# EAGLE board StackBreakoutConnection_4layers_V1.0_with_connector (EAGLE 9.6.2)
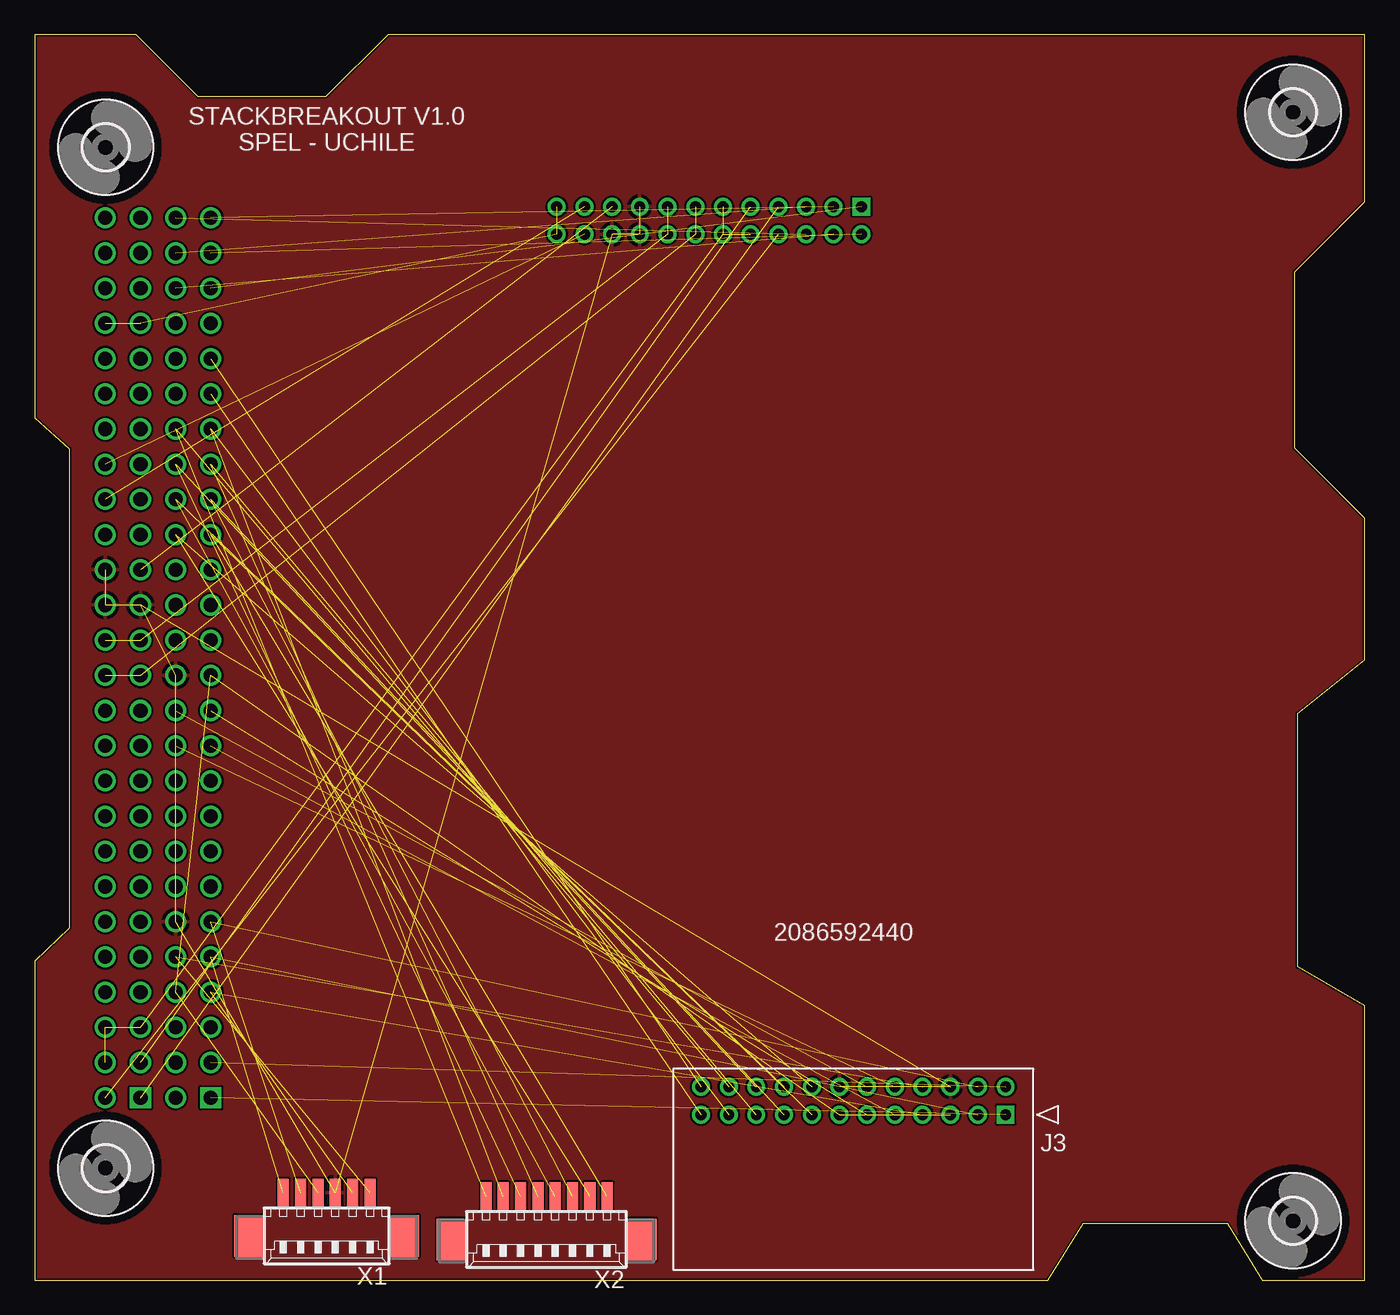
[diagram p0: board, top side]
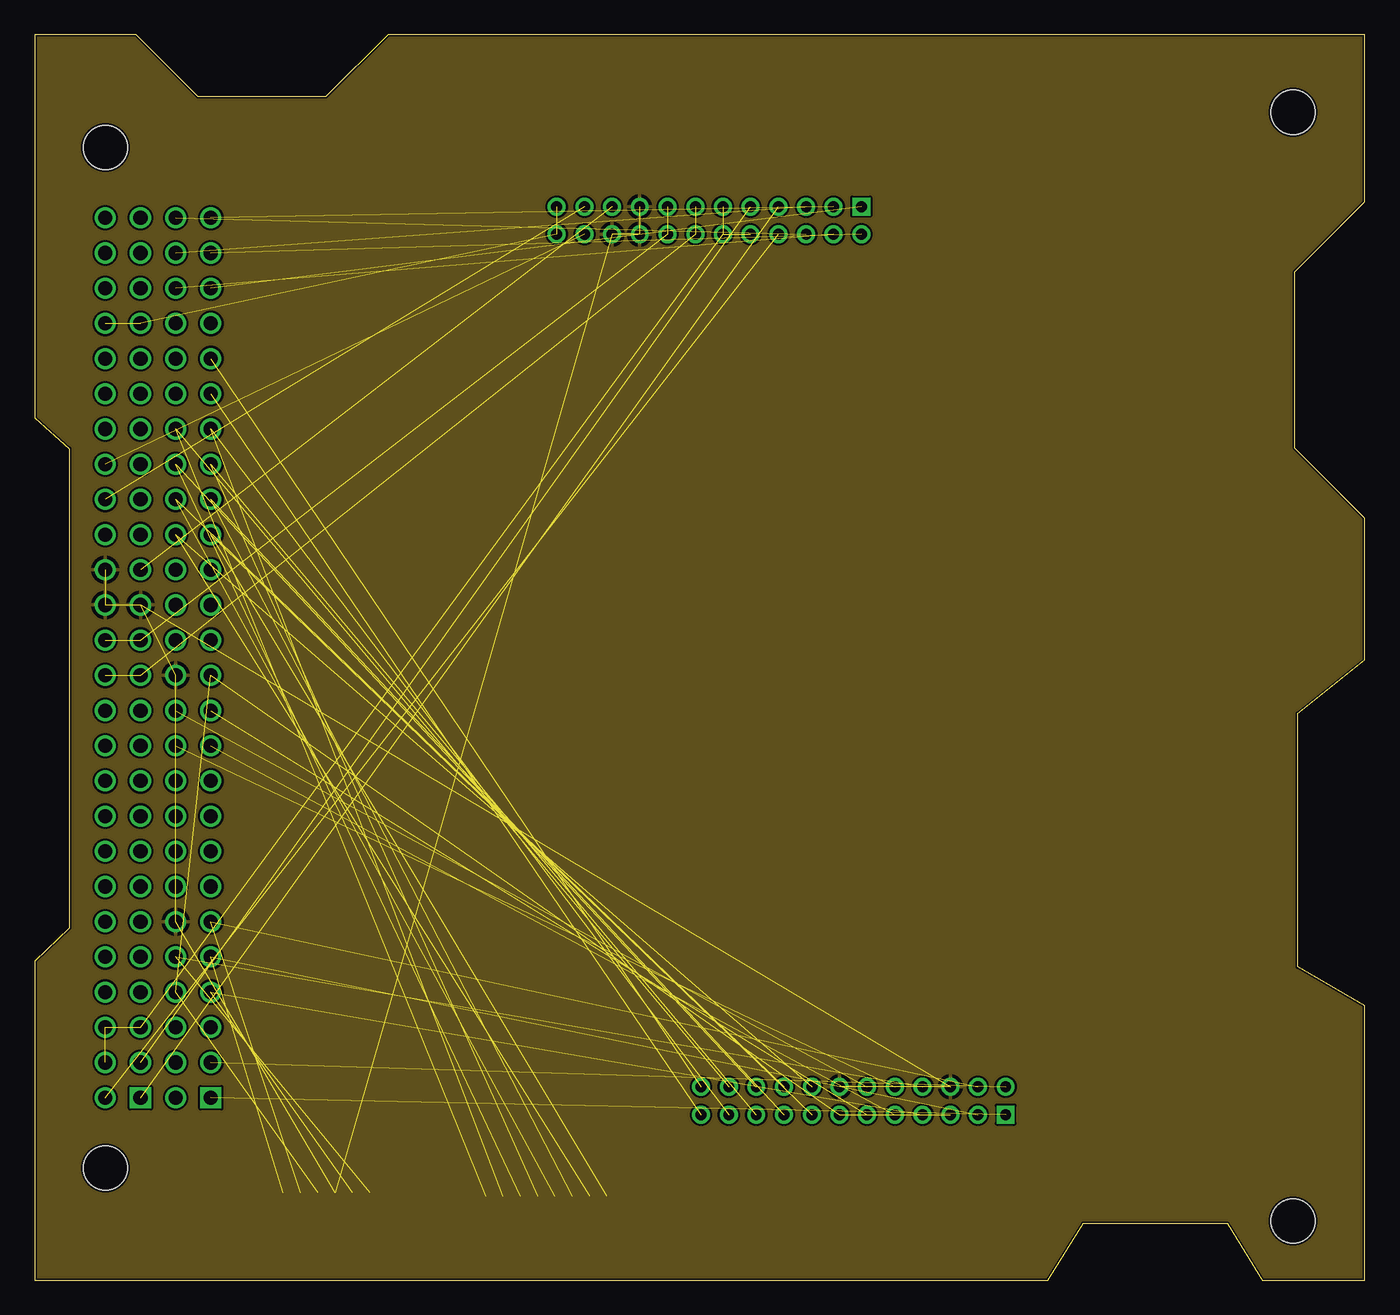
[diagram p1: board, inner layer Route2]
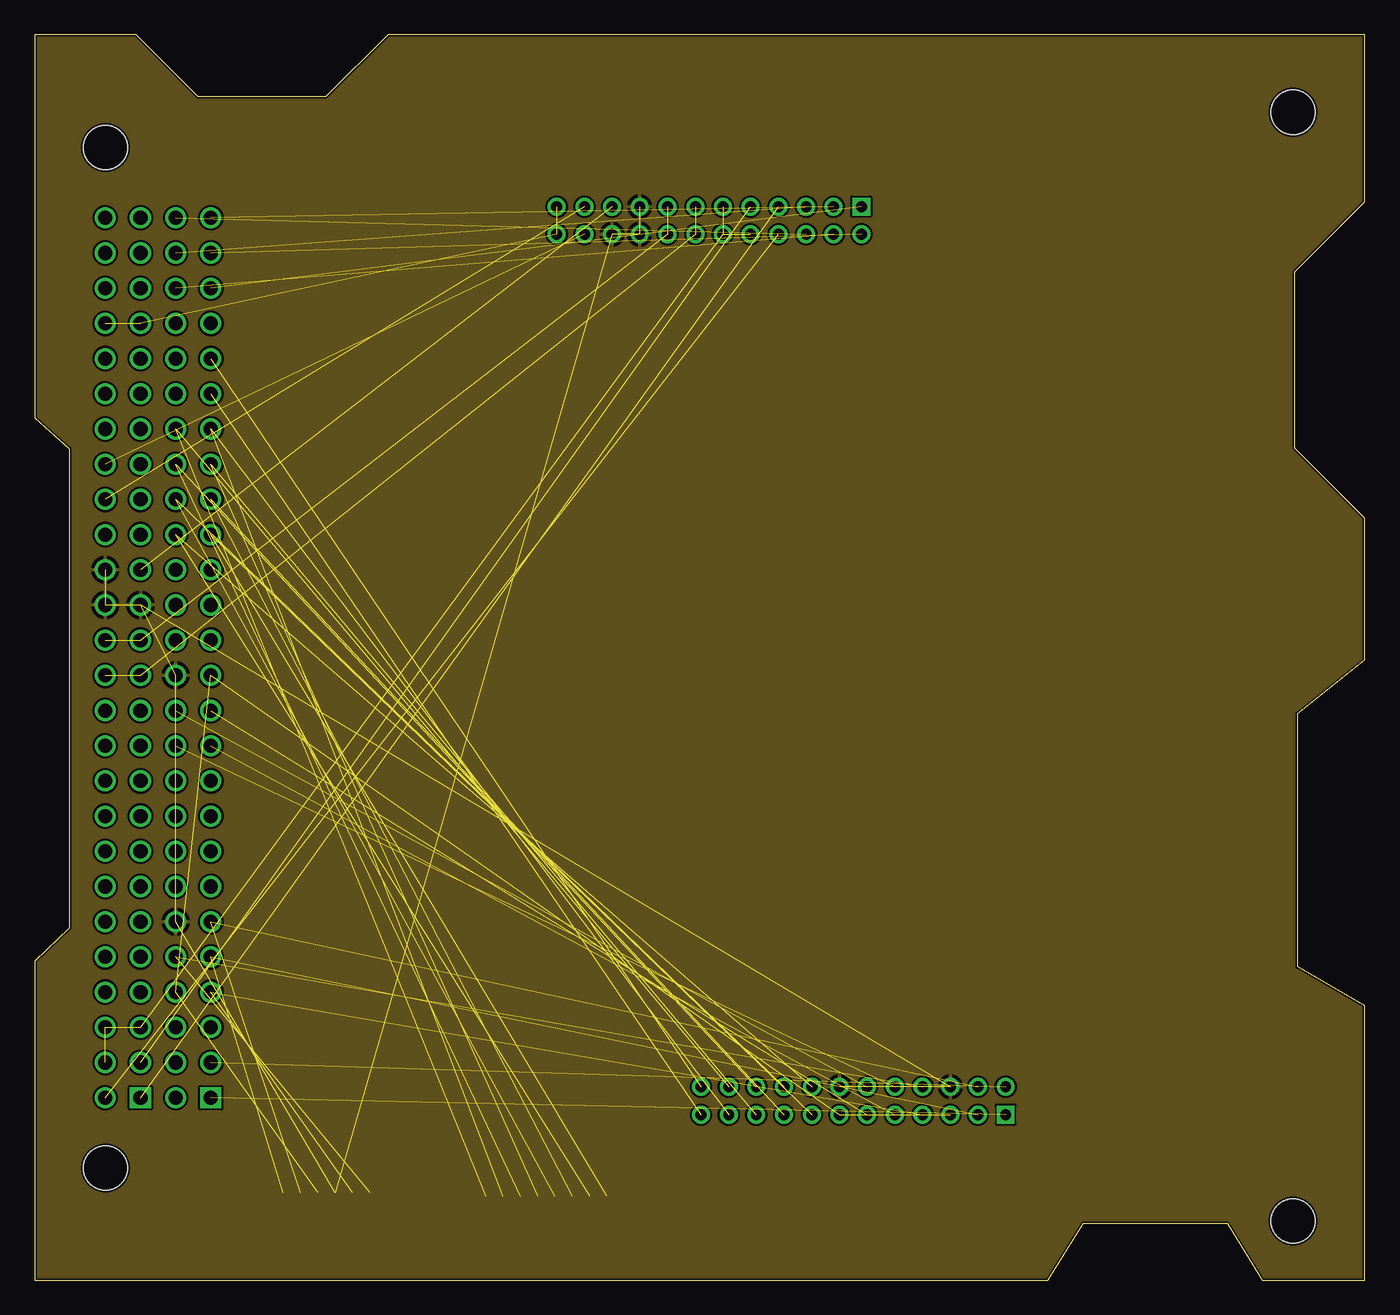
[diagram p2: board, inner layer Route15]
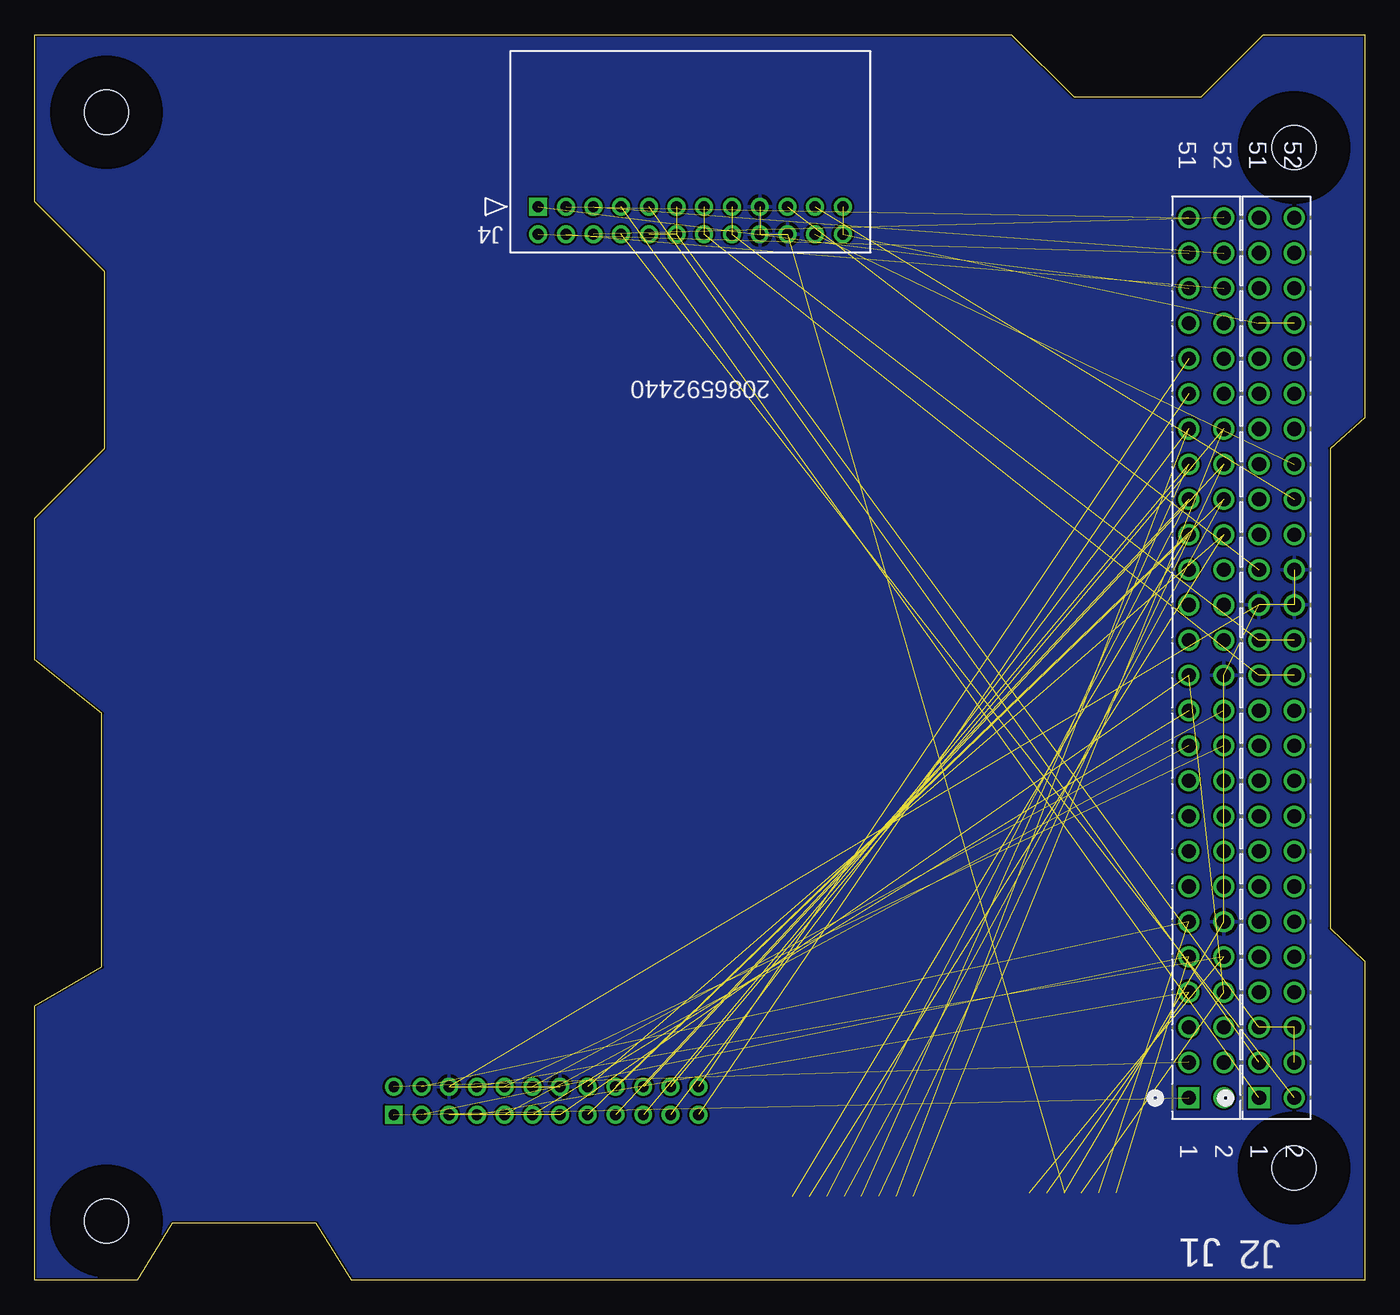
[diagram p3: board, bottom side, seen from below]

Size 96.04 x 89.88 mm. Coordinates in mm from the lower left corner, seen from the top.
Outline: 90.98,72.77 96.04,77.83 96.04,89.88 25.51,89.88 21.02,85.4 11.8,85.4 7.32,89.88 0,89.88 0,62.23 2.5,60 2.5,25.4 0,23 0,0 73.15,0 75.7,4.1 86.09,4.1 88.65,0 96.01,0 96.01,19.81 91.19,22.61 91.19,40.89 96.04,44.76 96.04,54.97 90.98,60.02 90.98,72.77
Copper layers (1+2*15+16): Top 0.035mm / dielectric 1.5mm / Route2 0.035mm / dielectric 0.15mm / Route15 0.035mm / dielectric 0.2mm / Bottom 0.035mm
Design rules "default *": minimum track width 20mil, minimum drill 0.2mm, track to track 6mil, track to pad 6mil, pad to pad 6mil, via to via 6mil, smd to smd 6mil, copper to edge 6mil, drill to drill 6mil, minimum pad ring 10mil, minimum via ring 8mil, stop-mask expansion 4mil, vias tented up to drill 0mil, thermal gap 10mil

## Footprints (pad centres in the part's own frame; a part is rotated, then mirrored left to right if it is on the bottom)
SAMTEC_SSQ-126-23-G-D = drill 1.016 square: 1 63.5,-2.54 | drill 1.016: 2 63.5,0; 3 60.96,-2.54; 4 60.96,0; 5 58.42,-2.54; 6 58.42,0; 7 55.88,-2.54; 8 55.88,0; 9 53.34,-2.54; 10 53.34,0; 11 50.8,-2.54; 12 50.8,0; 13 48.26,-2.54; 14 48.26,0; 15 45.72,-2.54; 16 45.72,0; 17 43.18,-2.54; 18 43.18,0; 19 40.64,-2.54; 20 40.64,0; 21 38.1,-2.54; 22 38.1,0; 23 35.56,-2.54; 24 35.56,0; 25 33.02,-2.54; 26 33.02,0; 27 30.48,-2.54; 28 30.48,0; 29 27.94,-2.54; 30 27.94,0; 31 25.4,-2.54; 32 25.4,0; 33 22.86,-2.54; 34 22.86,0; 35 20.32,-2.54; 36 20.32,0; 37 17.78,-2.54; 38 17.78,0; 39 15.24,-2.54; 40 15.24,0; 41 12.7,-2.54; 42 12.7,0; 43 10.16,-2.54; 44 10.16,0; 45 7.62,-2.54; 46 7.62,0; 47 5.08,-2.54; 48 5.08,0; 49 2.54,-2.54; 50 2.54,0; 51 0,-2.54; 52 0,0
CON_2086592440_MOL = drill 0.787 pad 1.143 square: 1 0,0 | drill 0.787 pad 1.143: 2 0,2.007; 3 -2.007,0; 4 -2.007,2.007; 5 -3.988,0; 6 -3.988,2.007; 7 -5.994,0; 8 -5.994,2.007; 9 -8.001,0; 10 -8.001,2.007; 11 -10.008,0; 12 -10.008,2.007; 13 -11.989,0; 14 -11.989,2.007; 15 -13.995,0; 16 -13.995,2.007; 17 -16.002,0; 18 -16.002,2.007; 19 -18.009,0; 20 -18.009,2.007; 21 -19.99,0; 22 -19.99,2.007; 23 -21.996,0; 24 -21.996,2.007
3,2 = hole 3.2: 0,0
53261-06 = smd 0.8 x 2: 1 3.125,-2.5; 2 1.875,-2.5; 3 0.625,-2.5; 4 -0.625,-2.5; 5 -1.875,-2.5; 6 -3.125,-2.5 | smd 2.1 x 3: S1 5.625,0.625; S2 -5.625,0.625
53261-08 = smd 0.8 x 2: 1 4.375,-2.5; 2 3.125,-2.5; 3 1.875,-2.5; 4 0.625,-2.5; 5 -0.625,-2.5; 6 -1.875,-2.5; 7 -3.125,-2.5; 8 -4.375,-2.5 | smd 2.1 x 3: S1 6.875,0.625; S2 -6.875,0.625

## Placement (x,y rotation side)
J1  SSQ-126-23-G-D  [SAMTEC_SSQ-126-23-G-D]  10.18,76.66 270 bottom
J2  SSQ-126-23-G-D  [SAMTEC_SSQ-126-23-G-D]  5.1,76.66 270 bottom
J3  2086592440  [CON_2086592440_MOL]  70.1,11.94 0 top
J4  2086592440  [CON_2086592440_MOL]  59.69,77.47 180 bottom
U$1  [3,2]  5.12,81.74 0 top
U$2  [3,2]  90.85,84.28 0 top
U$3  [3,2]  90.85,4.27 0 top
U$4  [3,2]  5.12,8.08 0 top
X1  53261-06  [53261-06]  21.08,3.81 180 top
X2  53261-08  [53261-08]  36.96,3.56 180 top

## Library data of the parts
J1 J2 = SPEL; MPN: SSQ-126-23-G-D; OC_FARNELL: -; OC_NEWARK: 82P0504; PACKAGE: RECEPTACLE, 2.54MM, DUAL, 52WAY; SUPPLIER: Samtec
J3 J4 = MolexP24; BUILT_BY: Molex_Team; COPYRIGHT: Copyright (C) 2018 Accelerated Designs. All rights reserved; DESCRIPTION: 2.00mm Pitch, iGrid PCB Header, Dual Row, Right-Angle, Through Hole, 0.10µm Gold (Au) Plating, Positive Lock, 24 Circuits, Tray, 3.20mm PC Tail Length, Natural; MANUFACTURER_PART_NUMBER: 2086592440; SOURCELIBRARY: Add_to_database_2021-04-21; VENDOR: Molex Connector Corporation
U$1-U$4 = holes
X1 = con-molex; MF: MOLEX; OC_FARNELL: 1125375; OC_NEWARK: unknown
X2 = con-molex; MF: MOLEX; OC_FARNELL: 1125376; OC_NEWARK: unknown

## Nets
3V3: J2.27 J2.28 J4.15 J4.16
5V0: J2.25 J2.26 J4.13 J4.14
5V0_IN: J1.32
AGND: J2.31 J4.19
AUX_1: J1.37 J3.19 X2.4
AUX_2: J1.38 J3.20 X2.3
AUX_3: J1.39 J3.21 X2.2
AUX_4: J1.40 J3.22 X2.1
CAN-H: J1.3 J3.2
CAN-L: J1.1 J3.1
EPS_RX: J2.36 J4.21
EPS_TX: J2.38 J4.22
GND: J1.12 J1.26 J2.29 J2.30 J2.32 J3.6 J3.14 J4.17 J4.18 J4.20 X1.4
GSSB_VCC: J1.8 J1.25 J3.5 J3.13 X1.3
GSSB_VCC2: J1.7 J3.7 X1.5
I2C2_SCL2: J1.11 J3.4 X1.2
I2C2_SDA2: J1.9 J3.3 X1.1
I2C-SCL: J1.43 J3.24
I2C-SDA: J1.41 J3.23
OUT1_3V3: J1.47 J4.1
OUT2_3V3: J1.49 J4.2
OUT3_3V3: J1.51 J4.3
OUT4_5V0: J1.48 J4.4
OUT5_5V0: J1.50 J4.5
OUT6_5V0: J1.52 J4.6
RX: J1.19
RX2: J2.35
SPI0_CS1: J1.21 J3.9
SPI0_MISO: J1.22 J3.10
SPI0_MOSI: J1.23 J3.11
SPI0_SCK: J1.24 J3.12
SPI_CS0: J2.4 J2.5 J2.6 J4.10 J4.11 J4.12
SPI_MISO: J2.1 J4.7
SPI_MOSI: J2.2 J4.8
SPI_SCK: J2.3 J4.9
TX: J1.20
TX2: J2.37
UART0_RX: J1.33 J3.15 X2.8
UART0_TX: J1.34 J3.16 X2.7
UART1_RX: J1.35 J3.17 X2.6
UART1_TX: J1.36 J3.18 X2.5
V_BAT: J2.45 J2.46 J4.23 J4.24
VAUX: J1.10 J3.8 X1.6

## Tracks (layer width: path | path; a pad name or v marks a point on that pad's centre or on a via)
3V3  (3 unrouted)
5V0  (3 unrouted)
AGND  (1 unrouted)
AUX_1  (2 unrouted)
AUX_2  (2 unrouted)
AUX_3  (2 unrouted)
AUX_4  (2 unrouted)
CAN-H  (1 unrouted)
CAN-L  (1 unrouted)
EPS_RX  (1 unrouted)
EPS_TX  (1 unrouted)
GND  (10 unrouted)
  pour Route15: -0.22,90.12 7.77,90.12 7.77,90.04 12.04,85.77 20.96,85.77 26.02,90.83 96.4,90.83 96.71,90.52 96.71,77.77 91.45,72.52 91.45,60.39 96.5,55.34 96.5,44.84 91.56,39.9 91.56,22.84 96.45,20.03 96.45,-0.36 88.28,-0.36 85.72,3.61 76.26,3.61 73.9,-0.36 -0.35,-0.36 -0.35,23.1 2.23,25.67 2.23,59.72 -0.23,62.18 -0.23,90.12 -0.23,90.12
  pour Top: -0.25,-0.13 73.41,-0.13 76.03,3.81 85.89,3.81 88.6,-0.25 96.27,-0.25 96.27,20.57 91.44,22.99 91.44,40.58 96.27,44.2 96.27,55.24 91.31,60.2 91.31,72.64 96.39,77.72 96.39,90.17 24.89,90.17 20.57,85.85 11.65,85.85 8.22,90.42 -0.25,90.42 -0.25,62.23 2.29,59.69 2.29,25.65 -0.25,23.11
  pour Route2: -0.46,-0.28 73.46,-0.28 76.08,3.66 85.9,3.66 88.53,-0.28 96.32,-0.28 96.32,20.42 91.87,22.64 91.87,40.87 96.32,44.2 96.32,55.22 91.36,60.17 91.36,72.62 96.44,77.7 96.44,90.4 25.32,90.4 20.75,85.83 11.77,85.83 8.62,90.02 -0.2,90.02 -0.2,62.33 2.08,60.05 2.08,25.88 -0.46,23.34
  pour Bottom: -0.27,90.34 7.08,90.34 7.08,90.4 11.74,85.74 11.74,85.86 20.77,85.86 26.09,91.18 95.59,91.18 96.65,90.11 96.65,77.24 91.53,72.11 91.53,60.11 96.71,54.93 96.71,44.56 91.64,39.49 91.64,22.93 96.27,20.25 96.27,-0.51 88.48,-0.51 85.92,3.45 76.54,3.45 74.18,-0.51 -0.4,-0.51 -0.4,23.33 2.18,25.9 2.18,59.57 -0.28,62.03 -0.28,90.35 -0.28,90.35
GSSB_VCC  (4 unrouted)
GSSB_VCC2  (2 unrouted)
I2C2_SCL2  (2 unrouted)
I2C2_SDA2  (2 unrouted)
I2C-SCL  (1 unrouted)
I2C-SDA  (1 unrouted)
OUT1_3V3  (1 unrouted)
OUT2_3V3  (1 unrouted)
OUT3_3V3  (1 unrouted)
OUT4_5V0  (1 unrouted)
OUT5_5V0  (1 unrouted)
OUT6_5V0  (1 unrouted)
SPI0_CS1  (1 unrouted)
SPI0_MISO  (1 unrouted)
SPI0_MOSI  (1 unrouted)
SPI0_SCK  (1 unrouted)
SPI_CS0  (5 unrouted)
SPI_MISO  (1 unrouted)
SPI_MOSI  (1 unrouted)
SPI_SCK  (1 unrouted)
UART0_RX  (2 unrouted)
UART0_TX  (2 unrouted)
UART1_RX  (2 unrouted)
UART1_TX  (2 unrouted)
V_BAT  (3 unrouted)
VAUX  (2 unrouted)

## Text on the board
tPlace: STACKBREAKOUT V1.0 / SPEL - UCHILE